# Altium PCB PROC091F.PcbDoc (part 3 of 8)
Units mil, origin at the board's own origin, x right, y up, seen from the top; angles counter-clockwise.
Board outline 3590.95 x 906.17 mil, 8 copper layers (Top Layer, GND1, Sig1, PWR1, PWR2, Sig2, GND2, Bottom Layer), stack 63.146 mil thick; 420 components, 316 nets, 1432 pads, 774 vias.
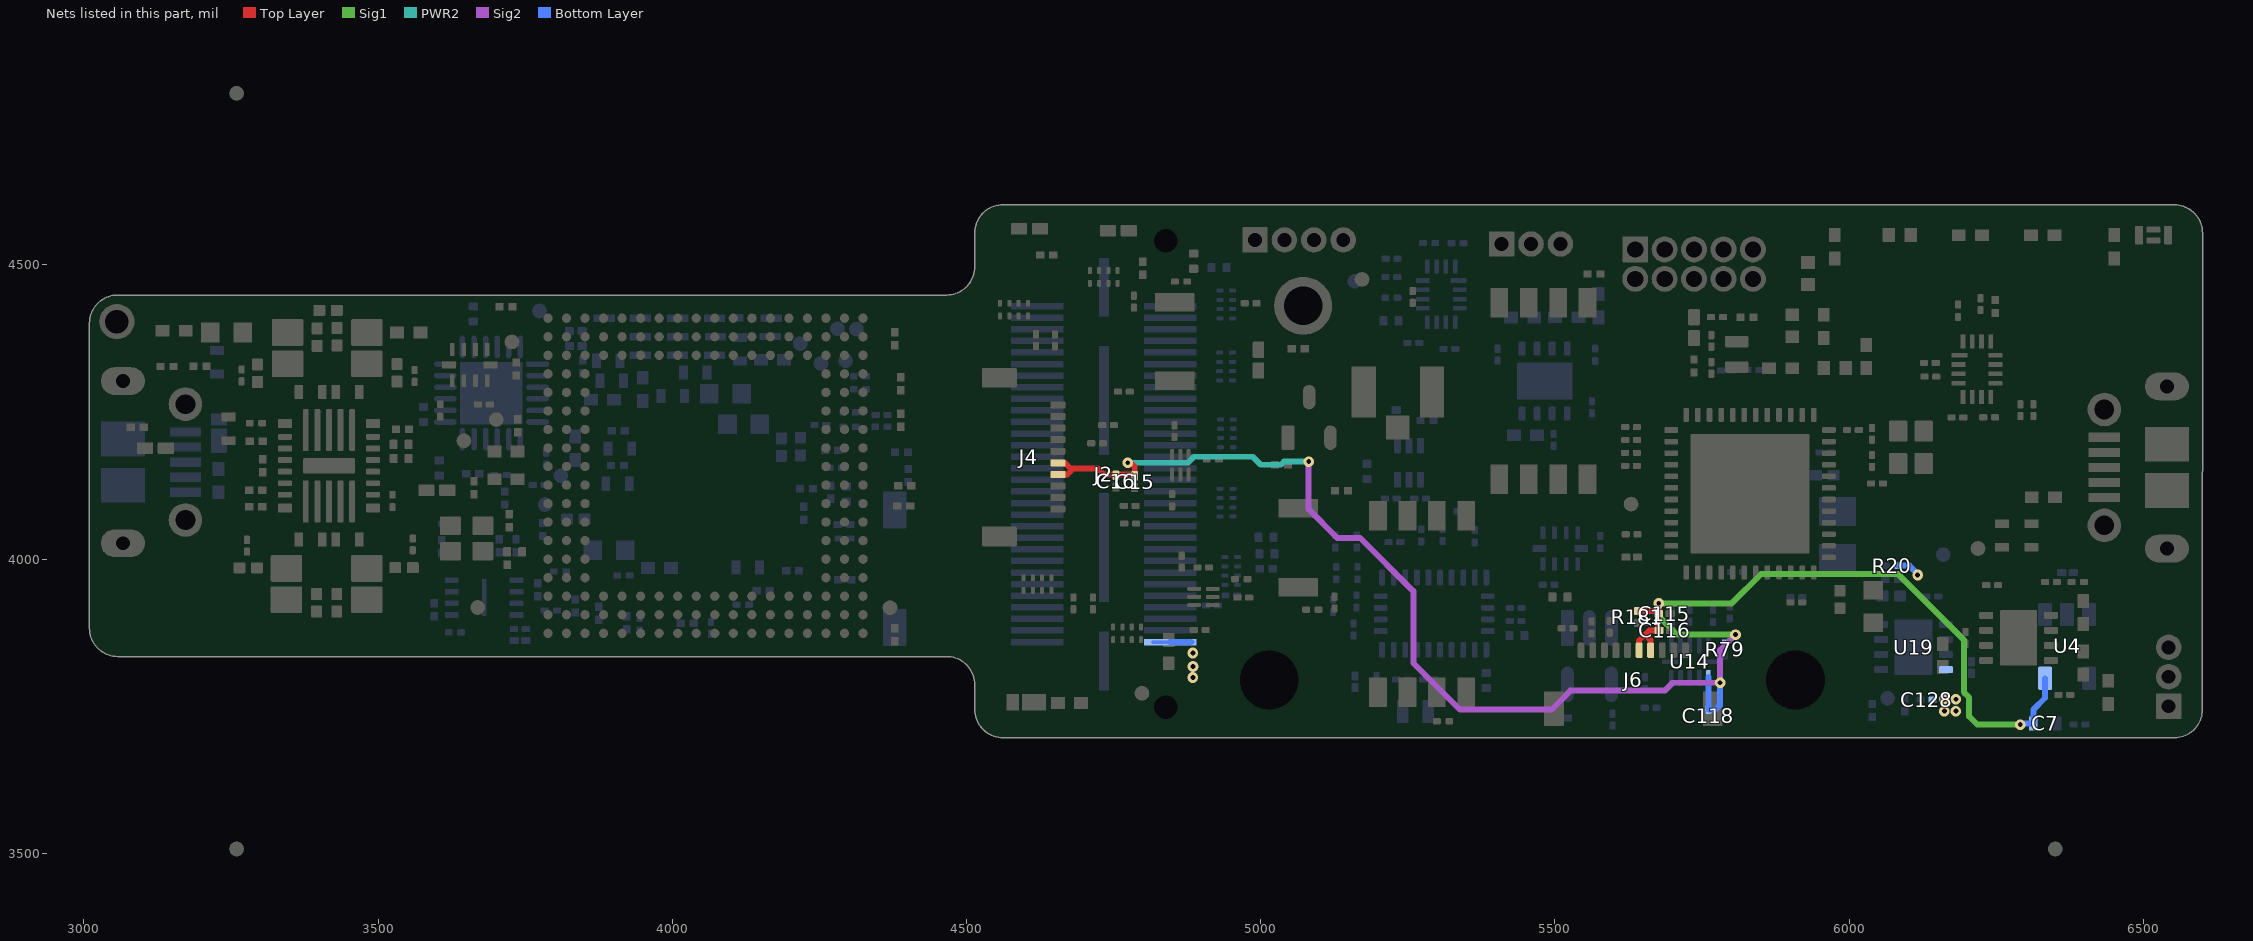
[diagram p8: the nets of this part, all layers, seen from the top]

## Part data (continued)
R4 R5 R9 R29 R37 R89 R92: library part CMP-0027261-3, "RES, 100 k, 1%, 0.05 W, 0201", Manufacturer=Vishay-Dale, Power_W=50mW, Supplier Part Number 1=541-100KAABCT-ND, TempCo="100 ppm/C", Tolerance_%=1%, Value2=0.05W, Value_Code=100k, AEC Category=Q200, AEC Grade=N/A, AEC Qualified=N, ComponentLink1Description="Datasheet link", ComponentLink1URL=http://www.vishay.com/docs/20052/crcw0201e3.pdf, CompType=Resistor, EIA_Code=E96, MountType=SMT, PackageReference=0201, PartNumber=CRCW0201100KFKED, Res_ohm=100k, RoHS=E, SizeArea_mm2=0.18, SizeX_mm=0.6, SizeY_mm=0.3, SizeZ_mm=0.26, Supplier 1=Digi-Key, Supplier 2=Newark, Supplier 3=Mouser, Supplier Part Number 2=84R1457, Supplier Part Number 3=71-CRCW0201100KFKED, Technology="Thick Film", Value1=1%, ValueDisplayed=100k, VDC_V=30V
R6 R46 R47 R48 R49: library part CMP-0027275-3, "RES, 33.2, 1%, 0.05 W, 0201", Manufacturer=Vishay-Dale, Power_W=50mW, Supplier Part Number 1=541-33.2ABCT-ND, TempCo="200 ppm/C", Tolerance_%=1%, Value2=0.05W, Value_Code=33R2, ValueDisplayed=33.2, AEC Category=Q200, AEC Grade=N/A, AEC Qualified=N, ComponentLink1Description="Datasheet link", ComponentLink1URL=http://www.vishay.com/docs/20052/crcw0201e3.pdf, CompType=Resistor, EIA_Code=E96, MountType=SMT, PackageReference=0201, PartNumber=CRCW020133R2FNED, Res_ohm=33.2, RoHS=E, SizeArea_mm2=0.18, SizeX_mm=0.6, SizeY_mm=0.3, SizeZ_mm=0.26, Supplier 1=Digi-Key, Supplier 2=Newark, Supplier 3=Mouser, Supplier Part Number 2=26W8649, Supplier Part Number 3=71-CRCW020133R2FNED, Technology="Thick Film", Value1=1%
R10 R11 R88 R130 R132 R133 R135 R137 R138 R140: library part CMP-0087185-1, "RES SMD 20 OHM 1% 1/20W 0201", Manufacturer=Yageo, Power_W=50mW, TempCo=200ppm/°C, Tolerance_%=1%, AEC Grade="Grade 0", AEC Qualified=Yes, ComponentLink1Description=Datasheet, ComponentLink1URL=http://www.yageo.com/NewPortal/yageodocoutput?fileName=/pdf/R-Chip/PYu-AC_51_RoHS_L_6.pdf, PackageReference=0201, PartNumber=AC0201FR-0720RL, Res_ohm=20, RoHS=TRUE, SizeZ_mm=0.26mm, Symbol Name=SYM-AC0201FR-0720RL, Technology="Thick Film", VDC_V=25V
R13 R15 R17 R42 R111: library part CMP-0027072-1, "RES, 220, 5%, 0.05 W, 0201", Manufacturer="Yageo America", Power_W=50mW, Supplier Part Number 1=311-220NCT-ND, TempCo="200 ppm/C", Tolerance_%=5%, Value2=0.05W, Value_Code=220R, ValueDisplayed=220, AEC Category=Q200, AEC Grade=N/A, AEC Qualified=N, ComponentLink1Description="Datasheet link", ComponentLink1URL=http://www.yageo.com/documents/recent/PYu-RC_Group_51_RoHS_L_5.pdf, CompType=Resistor, EIA_Code=E24, LatestRevisionDate=2017-03-09, MountType=SMT, PackageReference=0201, PartNumber=RC0201JR-07220RL, Published=2016-10-14, Publisher="Texas Instruments", Res_ohm=220, RoHS=Y, SizeArea_mm2=0.18, SizeX_mm=0.6, SizeY_mm=0.3, SizeZ_mm=0.26, Supplier 1=Digi-Key, Supplier 2=Mouser, Supplier Part Number 2=603-RC0201JR-07220RL, Technology="Thick Film", U/M=EA, Value1=5%, VDC_V=25V
R16 R174 R176: library part CMP-0027880-1, "RES, 7.87 k, 1%, 0.05 W, 0201", Manufacturer="Yageo America", Power_W=50mW, Supplier Part Number 1=YAG2807CT-ND, TempCo="200 ppm/C", Tolerance_%=1%, Value2=0.05W, Value_Code=7k87, ValueDisplayed=7.87k, AEC Category=Q200, AEC Grade=N/A, AEC Qualified=N, ComponentLink1Description="Datasheet link", ComponentLink1URL=http://www.yageo.com/documents/recent/PYu-RC_Group_51_RoHS_L_5.pdf, CompType=Resistor, EIA_Code=E96, LatestRevisionDate=2017-03-09, MountType=SMT, PackageReference=0201, PartNumber=RC0201FR-077K87L, Published=2016-10-14, Publisher="Texas Instruments", Res_ohm=7.87k, RoHS=Y, SizeArea_mm2=0.18, SizeX_mm=0.6, SizeY_mm=0.3, SizeZ_mm=0.26, Supplier 1=Digi-Key, Supplier 2=Mouser, Supplier Part Number 2=603-RC0201FR-077K87L, Technology="Thick Film", U/M=EA, Value1=1%, VDC_V=25V
R24: library part CMP-0087183-1, "RES SMD 200 OHM 1% 1/5W 0402", Manufacturer="Vishay Dale", Power_W=200mW, TempCo=100ppm/°C, Tolerance_%=1%, AEC Grade="Grade 0", AEC Qualified=Yes, ComponentLink1Description=Datasheet, ComponentLink1URL=http://www.vishay.com/docs/20043/crcwhpe3.pdf, PackageReference=0402, PartNumber=CRCW0402200RFKEDHP, Res_ohm=200, RoHS=TRUE, SizeZ_mm=0.4mm, Symbol Name=SYM-CRCW0402200RFKEDHP, Technology="Thick Film", VDC_V=50V
R25 R26 R33 R34 R38 R40 R64 R69 R141: library part CMP-0027745-1, "RES, 4.99 k, 1%, 0.05 W, 0201", Manufacturer="Yageo America", Power_W=50mW, Supplier Part Number 1=YAG2712CT-ND, TempCo="200 ppm/C", Tolerance_%=1%, Value2=0.05W, Value_Code=4k99, ValueDisplayed=4.99k, AEC Category=Q200, AEC Grade=N/A, AEC Qualified=N, ComponentLink1Description="Datasheet link", ComponentLink1URL=http://www.yageo.com/documents/recent/PYu-RC_Group_51_RoHS_L_5.pdf, CompType=Resistor, EIA_Code=E96, LatestRevisionDate=2017-03-09, MountType=SMT, PackageReference=0201, PartNumber=RC0201FR-074K99L, Published=2016-10-14, Publisher="Texas Instruments", Res_ohm=4.99k, RoHS=Y, SizeArea_mm2=0.18, SizeX_mm=0.6, SizeY_mm=0.3, SizeZ_mm=0.26, Supplier 1=Digi-Key, Supplier 2=Mouser, Supplier Part Number 2=603-RC0201FR-074K99L, Technology="Thick Film", U/M=EA, Value1=1%, VDC_V=25V
R27 R39 R107 R108: library part CMP-0027137-1, "RES, 510, 5%, 0.05 W, 0201", Manufacturer="Yageo America", Power_W=50mW, Supplier Part Number 1=YAG2907CT-ND, TempCo="200 ppm/C", Tolerance_%=5%, Value2=0.05W, Value_Code=510R, ValueDisplayed=510, AEC Category=Q200, AEC Grade=N/A, AEC Qualified=N, ComponentLink1Description="Datasheet link", ComponentLink1URL=http://www.yageo.com/documents/recent/PYu-RC_Group_51_RoHS_L_5.pdf, CompType=Resistor, EIA_Code=E24, LatestRevisionDate=2017-03-09, MountType=SMT, PackageReference=0201, PartNumber=RC0201JR-07510RL, Published=2016-10-14, Publisher="Texas Instruments", Res_ohm=510, RoHS=Y, SizeArea_mm2=0.18, SizeX_mm=0.6, SizeY_mm=0.3, SizeZ_mm=0.26, Supplier 1=Digi-Key, Supplier 2=Mouser, Supplier Part Number 2=603-RC0201JR-07510RL, Technology="Thick Film", U/M=EA, Value1=5%, VDC_V=25V
R50 R75: library part CMP-0027052-1, "RES, 1.0 k, 5%, 0.05 W, 0201", Manufacturer="Yageo America", Power_W=50mW, Supplier Part Number 1=311-1KNCT-ND, TempCo="200 ppm/C", Tolerance_%=5%, Value2=0.05W, Value_Code=1k00, ValueDisplayed=1.0k, AEC Category=Q200, AEC Grade=N/A, AEC Qualified=N, ComponentLink1Description="Datasheet link", ComponentLink1URL=http://www.yageo.com/documents/recent/PYu-RC_Group_51_RoHS_L_5.pdf, CompType=Resistor, EIA_Code=E24, LatestRevisionDate=2017-03-09, MountType=SMT, PackageReference=0201, PartNumber=RC0201JR-071KL, Published=2016-10-14, Publisher="Texas Instruments", Res_ohm=1k, RoHS=Y, SizeArea_mm2=0.18, SizeX_mm=0.6, SizeY_mm=0.3, SizeZ_mm=0.26, Supplier 1=Digi-Key, Supplier 2=Mouser, Supplier Part Number 2=603-RC0201JR-071KL, Technology="Thick Film", U/M=EA, Value1=5%, VDC_V=25V
R52: library part CMP-0027452-1, "RES, 1.96 k, 1%, 0.05 W, 0201", Manufacturer="Yageo America", Power_W=50mW, Supplier Part Number 1=YAG2494CT-ND, TempCo="200 ppm/C", Tolerance_%=1%, Value2=0.05W, Value_Code=1k96, ValueDisplayed=1.96k, AEC Category=Q200, AEC Grade=N/A, AEC Qualified=N, ComponentLink1Description="Datasheet link", ComponentLink1URL=http://www.yageo.com/documents/recent/PYu-RC_Group_51_RoHS_L_5.pdf, CompType=Resistor, EIA_Code=E96, LatestRevisionDate=2017-03-09, MountType=SMT, PackageReference=0201, PartNumber=RC0201FR-071K96L, Published=2016-10-14, Publisher="Texas Instruments", Res_ohm=1.96k, RoHS=Y, SizeArea_mm2=0.18, SizeX_mm=0.6, SizeY_mm=0.3, SizeZ_mm=0.26, Supplier 1=Digi-Key, Supplier 2=Mouser, Supplier Part Number 2=603-RC0201FR-071K96L, Technology="Thick Film", U/M=EA, Value1=1%, VDC_V=25V
R53 R54 R55 R56: library part CMP-0086444-2, "RES Thick Film SMD 3.83O 1% 1/16W 0402 200ppm/°C", Manufacturer=Yageo, Power_W=63mW, TempCo=200ppm/°C, Tolerance_%=1%, AEC Qualified=No, ComponentLink1Description=Datasheet, ComponentLink1URL=http://www.yageo.com/documents/recent/PYu-RC_Group_51_RoHS_L_10.pdf, PackageReference="0402 (1005 Metric)", PartNumber=RC0402FR-073R83L, Res_ohm=3.83, RoHS=TRUE, SizeZ_mm=0.4mm, Technology="Thick Film", VDC_V=50V
R79 R180 R181: library part CMP-0087184-1, "RESISTOR, 0201, 0.05W, 1%, 4K7", Manufacturer="Panasonic Electronic Components", Power_W=50mW, TempCo=200ppm/°C, Tolerance_%=1%, AEC Grade="Grade 1", AEC Qualified=Yes, ComponentLink1Description=Datasheet, ComponentLink1URL=https://industrial.panasonic.com/cdbs/www-data/pdf/RDA0000/AOA0000C304.pdf, PackageReference=0201, PartNumber=ERJ-1GNF4701C, Res_ohm=4.7k, RoHS=TRUE, SizeZ_mm=0.26mm, Symbol Name=SYM-ERJ-1GNF4701C, Technology="Thick Film", VDC_V=25V
R114 R117 R119 R126: library part CMP-0026491-2, "RES, 61.9, 1%, 0.063 W, AEC-Q200 Grade 0, 0402", Manufacturer=Vishay-Dale, Power_W=63mW, Supplier Part Number 1=541-61.9LCT-ND, TempCo="100 ppm/C", Tolerance_%=1%, Value2=0.063W, Value_Code=61R9, ValueDisplayed=61.9, AEC Category=Q200, AEC Grade=0, AEC Qualified=Y, ComponentLink1Description="Datasheet link", ComponentLink1URL=http://www.vishay.com/docs/20035/dcrcwe3.pdf, CompType=Resistor, EIA_Code=E96, MountType=SMT, PackageReference=0402, PartNumber=CRCW040261R9FKED, Res_ohm=61.9, RoHS=E, SizeArea_mm2=0.5, SizeX_mm=1, SizeY_mm=0.5, SizeZ_mm=0.6, Supplier 1=Digi-Key, Supplier 2=Newark, Supplier 3=Mouser, Supplier Part Number 2=52K7198, Supplier Part Number 3=71-CRCW0402-61.9-E3, Technology="Thick Film", Value1=1%, VDC_V=50V
R158 R170 R172: library part CMP-0027891-1, "RES, 82.5 k, 1%, 0.05 W, 0201", Manufacturer="Yageo America", Power_W=50mW, Supplier Part Number 1=YAG2815CT-ND, TempCo="200 ppm/C", Tolerance_%=1%, Value2=0.05W, Value_Code=82k5, ValueDisplayed=82.5k, AEC Category=Q200, AEC Grade=N/A, AEC Qualified=N, ComponentLink1Description="Datasheet link", ComponentLink1URL=http://www.yageo.com/documents/recent/PYu-RC_Group_51_RoHS_L_5.pdf, CompType=Resistor, EIA_Code=E96, LatestRevisionDate=2017-03-09, MountType=SMT, PackageReference=0201, PartNumber=RC0201FR-0782K5L, Published=2016-10-14, Publisher="Texas Instruments", Res_ohm=82.5k, RoHS=Y, SizeArea_mm2=0.18, SizeX_mm=0.6, SizeY_mm=0.3, SizeZ_mm=0.26, Supplier 1=Digi-Key, Supplier 2=Mouser, Supplier Part Number 2=603-RC0201FR-0782K5L, Technology="Thick Film", U/M=EA, Value1=1%, VDC_V=25V
R159 R171: library part CMP-0027165-1, "RES, 750, 5%, 0.05 W, 0201", Manufacturer="Yageo America", Power_W=50mW, Supplier Part Number 1=YAG2927CT-ND, TempCo="200 ppm/C", Tolerance_%=5%, Value2=0.05W, Value_Code=750R, ValueDisplayed=750, AEC Category=Q200, AEC Grade=N/A, AEC Qualified=N, ComponentLink1Description="Datasheet link", ComponentLink1URL=http://www.yageo.com/documents/recent/PYu-RC_Group_51_RoHS_L_5.pdf, CompType=Resistor, EIA_Code=E24, LatestRevisionDate=2017-03-09, MountType=SMT, PackageReference=0201, PartNumber=RC0201JR-07750RL, Published=2016-10-14, Publisher="Texas Instruments", Res_ohm=750, RoHS=Y, SizeArea_mm2=0.18, SizeX_mm=0.6, SizeY_mm=0.3, SizeZ_mm=0.26, Supplier 1=Digi-Key, Supplier 2=Mouser, Supplier Part Number 2=603-RC0201JR-07750RL, Technology="Thick Film", U/M=EA, Value1=5%, VDC_V=25V
RA1 RA2 RA3 RA4 RA5 RA6 RA7 RA8 RA9: library part CMP-0087186-1, "RES ARRAY 4 RES ZERO OHM 0502", Manufacturer="Panasonic Electronic Components", Power_W=100mW, TempCo=-200/+600ppm/°C, Tolerance_%=5%, AEC Qualified=No, ComponentLink1Description=Datasheet, ComponentLink1URL=https://industrial.panasonic.com/cdbs/www-data/pdf/AOC0000/AOC0000C14.pdf, PackageReference=0502, PartNumber=EXB-18VR000X, Res_ohm=0, RoHS=TRUE, SizeZ_mm=0.45mm, Symbol Name=SYM-EXB-18VR000X, Technology="Thick Film", VDC_V=12.5V
S1 S2: library part CMP-0002128-2, "Switch, Slide, SPST 4 poles, SMT", CurrentRating_mA=25A, Manufacturer="CTS Electrocomponents", Supplier Part Number 1=CT2184LPST-ND, Circuit=SPST, ComponentLink1Description="Datasheet URL", ComponentLink1URL=http://www.ctscorp.com/components/Datasheets/218.pdf, CompType=Switch, LatestRevisionDate=2017-03-09, MountType=SMT, Orientation=Horizontal, PackageReference="SW, SMT Half Pitch 4SPST, 5.8x2.7x6.25 mm", PartNumber=218-4LPST, PositionCount=4, Publisher="Texas Instruments", RoHS=Y, Supplier 1=Digi-Key, Supplier 2=Mouser, Supplier Part Number 2=774-2184LPST, SwitchFunction=Off-On, VDC_V=24V
S3: library part CMP-0087181-1, "SWITCH SLIDE DIP SPST 100MA 6V", Manufacturer="Nidec Copal Electronics", Circuit=SPST, ComponentLink1Description=Datasheet, ComponentLink1URL=https://www.nidec-copal-electronics.com/e/catalog/switch/chs.pdf, MountType="Surface Mount", PackageReference=SMT_SW_5MM4_2MM5, PartNumber=CHS-01TA, PositionCount=1, RoHS=TRUE, SizeZ_mm=2.5mm, Symbol Name=SYM-CHS-01TA, VDC_V=6V
SW2 SW3: library part CMP-0002150-2, "SWITCH TACTILE SPST-NO 0.05A 12V", CurrentRating_mA=50A, Manufacturer="Omron Electronic Components", Supplier Part Number 1=SW1020CT-ND, Circuit=SPST-NO, ComponentLink1Description="Datasheet URL", ComponentLink1URL=http://www.components.omron.com/components/web/PDFLIB.nsf/0/2DD3893C7DD33E9E862572900079E9D6/$file/B3U_1110.pdf, CompType=Switch, LatestRevisionDate=2017-03-09, MountType=SMT, Orientation="Top Actuated", PackageReference=3x1.6x2.5mm, PartNumber=B3U-1000P, PositionCount=1, Publisher="Texas Instruments", RoHS=Y, Supplier 1=Digi-Key, Supplier 2=Newark, Supplier 3=Mouser, Supplier Part Number 2=34M5295, Supplier Part Number 3=653-B3U-1000P, SwitchFunction=Off-Mom, VDC_V=12V
TP2 TP3 TP4 TP5 TP6 TP7 TP8 TP9 TP10 TP11 TP12 TP13 TP14 TP15 TP16 TP17 TP18 TP19 TP26 TP27 TP46: library part CMP-0078143-3, "TEST POINT.  No entry in BOM.", Manufacturer=N/A, CompType=Testpoint, PackageReference=N/A, PartNumber=N/A
TP20: library part CMP-0086474-1, "PC Test Point, Loop Brass, Tin Plating 0.047\" (1.19mm) Hole Diameter Mounting Type", Manufacturer="Keystone Electronics", ComponentLink1Description=Datasheet, ComponentLink1URL=https://www.keyelco.com/product-pdf.cfm?p=1307, ContactFinish=Tin, PackageReference=HDR1, PartNumber=4953, PinCount=1, RoHS=TRUE, Symbol Name=SYM-4953
U1: library part CMP-0079120-2, "4-A + 2.5-A + Two 1.5-A Buck Converters With Integrated Switches, RNF0026C (VQFN-HR-26)", Alternate Manufacturer="Texas Instruments", Alternate PartNumber=LP87524JRNFTQ1, AEC Category=Q200, AEC Qualified=Y, ComponentLink1Description="Datasheet Link", ComponentLink1URL=http://www.ti.com/lit/ds/symlink/lp87524-q1.pdf, ComponentLink2Description="Product Folder", ComponentLink2URL=http://www.ti.com/product/lp87524-q1, CompType=IC, Manufacturer="Texas Instruments", MountType=SMT, PackageDescription=VQFN-HR-26, PackageReference=RNF0026C, PartNumber=LP87524JRNFRQ1, RoHS=Y, SizeArea_mm2=18, SizeAreaWB_mm2=27.5, SizeX_mm=4, SizeY_mm=4.5, SizeZ_mm=0.9
U2: library part CMP-0860942-2, "XI6843ARQGALP, ALP0180A (BGA-180)", Alternate Manufacturer="Texas Instruments", AEC Category=Q200, AEC Qualified=N, ComponentLink1Description="Datasheet Link", ComponentLink1URL=http://www.ti.com/lit/ds/symlink/xi6843arqg.pdf, ComponentLink2Description="Product Folder", ComponentLink2URL=http://www.ti.com/product/xi6843arqg, ComponentLink3Description="Online Datasheet", ComponentLink3URL=http://www.ti.com/product/xi6843arqg/datasheet, CompType=IC, Manufacturer="Texas Instruments", MountType=SMT, PackageDescription=BGA-180, PackageReference=ALP0180A, PartNumber=XI6843ARQGALP, SizeArea_mm2=225, SizeAreaWB_mm2=289, SizeX_mm=15, SizeY_mm=15, SizeZ_mm=0.965
U3: library part CMP-0087172-1, "I/O Controller Interface IC USB to Dual UART bridge", Manufacturer="Silicon Labs", ComponentLink1Description=Datasheet, ComponentLink1URL=https://www.silabs.com/documents/public/data-sheets/CP2105.pdf, PackageReference=QFN24-EP, PartNumber=CP2105-F01-GMR, RoHS=TRUE, SizeZ_mm=0.8mm, Symbol Name=SYM-CP2105-F01-GMR
U4: library part CMP-0035419-1, "Single Output High PSRR LDO, 200 mA, Fixed 3 V Output, 2.7 to 5.5 V Input, 5-pin SOT-23 (DBV), -40 to 85 degC, Green (RoHS & no Sb/Br)", Manufacturer="Texas Instruments", Rating=Catalog, Accuracy(%)=2, Code_JEDEC=MO-178, ComponentLink1Description="Manufacturer URL", ComponentLink1URL=http://www.ti.com/, ComponentLink2Description=Datasheet, ComponentLink2URL=http://www.ti.com/general/docs/lit/getliterature.tsp?genericPartNumber=TPS79330&fileType=pdf, ComponentLink3Description="Package Specification", ComponentLink3URL=http://www.ti.com/litv/pdf/mpds018i, DatasheetVersion=SLVS348K, Eco-Plan="Green (RoHS & no Sb/Br)", Fixed Output Options(V)=3, Iout(Max)(A)=0.2, Iq(Typ)(mA)=0.2, Mounting Technology="Surface Mount", PackageDescription="5-Pin Plastic Small Outline, Body 1.60 Ã— 2.90 mm, Pitch 0.95 mm", PackageReference=DBV0005A, PackageVersion=4073253-4/K, PartNumber=TPS79330DBVR, SubFamily="Single Channel LDO", Vdo(Typ)(mV)=112, Vin(Max)(V)=5.5, Vin(Min)(V)=2.7, Vout Adj(Max)(V)=3, Vout Adj(Min)(V)=3
U5: library part CMP-0067398-2, "Automotive Grade, 1.4V-Capable +/-0.5degC Temperature Sensor with Alert Function and I2C/SMBus, DRL0006A (SOT-OTHER-6)", Alternate Manufacturer="Texas Instruments", ComponentLink1Description="Datasheet Link", ComponentLink1URL=http://www.ti.com/lit/ds/symlink/tmp112-q1.pdf, CompType=IC, LatestRevisionDate=2017-06-09, Manufacturer="Texas Instruments", MountType=SMT, PackageDescription=SOT-OTHER-6, PackageReference=DRL0006A, PartNumber=TMP112AQDRLRQ1, Publisher="Texas Instruments", RoHS=Y, SizeArea_mm2=2.56, SizeAreaWB_mm2=6.76, SizeX_mm=1.6, SizeY_mm=1.6, SizeZ_mm=0.6, U/M=EA
U6: library part CMP-0087170-1, "8KB I2C SER EEPROM TSOT 23", Manufacturer="ON Semiconductor", ComponentLink1Description=Datasheet, ComponentLink1URL=https://www.onsemi.com/pub/Collateral/CAT24C01-D.PDF, PackageReference=TSOT-23-5, PartNumber=CAT24C08TDI-GT3, RoHS=TRUE, SizeZ_mm=1mm, Symbol Name=SYM-CAT24C08TDI-GT3
U7: library part CMP-0087171-1, "IMU ACCEL/GYRO/MAG I2C 32BIT", Manufacturer="Hillcrest Laboratories, Inc.", ComponentLink1Description=Datasheet, ComponentLink1URL=https://www.hillcrestlabs.com/download/5a747b8d566d073a5d000536, PackageReference=LGA28, PartNumber=BNO085, RoHS=TRUE, SizeZ_mm=1.18mm, Symbol Name=SYM-BNO085
U8: library part CMP-0083675-2, "SimpleLink(TM) Bluetooth(R) 5 low energy Wireless MCU, RGZ0048A (VQFN-48)", Alternate Manufacturer="Texas Instruments", Alternate PartNumber=CC2642R1FRGZT, Operating Temperature Range="-40 to 85 C", Rating=#N/A, AEC Category=Q200, AEC Qualified=N, ComponentLink1Description="Datasheet Link", ComponentLink1URL=http://www.ti.com/lit/ds/symlink/cc2642r.pdf, ComponentLink2Description="Product Folder", ComponentLink2URL=http://www.ti.com/product/cc2642r, ComponentLink3Description="Online Datasheet", ComponentLink3URL=http://www.ti.com/product/cc2642r/datasheet, CompType=IC, Manufacturer="Texas Instruments", MountType=SMT, PackageDescription=VQFN-48, PackageReference=RGZ0048A, PartNumber=CC2642R1FRGZR, SizeArea_mm2=49, SizeAreaWB_mm2=81, SizeX_mm=7, SizeY_mm=7, SizeZ_mm=1
U9: library part CMP-0078466-1, "ULTRA LOW POWER, 16M-BIT [x 1/x 2/x 4] CMOS MXSMIO (SERIAL MULTI I/O) FLASH MEMORY, SON-8", Manufacturer="Macronix International Co., LTD", Supplier Part Number 1=1092-1178-1-ND, ComponentLink1Description="Datasheet URL", ComponentLink1URL=http://www.macronix.com/Lists/Datasheet/Attachments/6257/MX25R1635F,%20Wide%20Range,%2016Mb,%20v1.5.pdf, MountType=SMT, PackageReference=SON-8, PartNumber=MX25R1635FZUIH0, RoHS=Y, SizeArea_mm2=6, SizeAreaWB_mm2=12, SizeX_mm=3, SizeY_mm=2, SizeZ_mm=0.6, Supplier 1=Digi-Key
U10: library part CMP-0043349-1, "Low-Voltage 8-Bit I2C and SMBus I/O Expander, 1.65 to 5.5 V, -40 to 85 degC, 16-pin UQFN (RSV), Green (RoHS & no Sb/Br)", 5V Tolerant I/O=Yes, Manufacturer="Texas Instruments", Max Frequency(kHz)=400, # of I/Os=8, Code_JEDEC=MO-288*, ComponentLink1Description=Datasheet, ComponentLink1URL=http://www.ti.com/general/docs/lit/getliterature.tsp?genericPartNumber=TCA6408A&fileType=pdf, ComponentLink2Description="Package Specification", ComponentLink2URL=http://www.ti.com/litv/pdf/mpqf115g, Configuration Registers=Yes, DatasheetVersion=SCPS192C, Eco-Plan="Green (RoHS & no Sb/Br)", fSCLK(Max)(MHz)=400, I2C Address="0100 00x", Interrupt Output=Yes, Low Power=Yes, Mounting Technology="Surface Mount", No. of Outputs=8, PackageDescription="16-Leads Plastic Quad Flatpack No-Lead, 2.6 x 1.8 x 0.5 mm Body, 0.4 mm Pitch", PackageReference=RSV0016A, PackageVersion="revD, Dec-2011", PartNumber=TCA6408ARSVR, Push-Pull I/O Type=Yes, Reset Input=Yes, SubFamily="I2C IO Expander", VCC(Max)(V)=5.5, VCC(Min)(V)=1.65, Vcc range(V)="1.65 to 5.5"
U11: library part CMP-0050992-5, "1-Channel, 2:1 Analog Switch, DSF0006A (X2SON-6)", F @ Nom Voltage(Max)(Mhz)=150, Generic Part Number=SN74LVC1G3157, ICC @ Nom Voltage(Max)(mA)=0.01, Manufacturer="Texas Instruments", Operating Temperature Range="-40 to 85 C", Rating=Catalog, tpd @ Nom Voltage(Max)(ns)=2,1.2,0.8,0.3, Voltage(Nom)(V)=1.8,2.5,3.3,5, 3-State Output=No, AEC Category=Q200, AEC Qualified=N, Bits(#)=1, Channels(#)=1, ComponentLink1Description="Datasheet Link", ComponentLink1URL=http://www.ti.com/lit/ds/symlink/sn74lvc1g3157.pdf, ComponentLink2Description="Product Folder", ComponentLink2URL=http://www.ti.com/product/sn74lvc1g3157, ComponentLink3Description="Online Datasheet", ComponentLink3URL=http://www.ti.com/product/sn74lvc1g3157/datasheet, CompType=IC, Input Type=CMOS/TTL, Logic=True, MountType=SMT, Mux Configuration=1:2, Output Drive (IOL/IOH)(Max)(mA)=32/-32, Output Type=CMOS, PackageDescription=X2SON-6, PackageReference=DSF0006A, PartNumber=SN74LVC1G3157DSFR, RoHS=Y, Schmitt Trigger=No, Switch Configuration=SPDT, Technology Family=LVC, VCC(Max)(V)=5.5, VCC(Min)(V)=1.65
U12 U17: library part CMP-0065183-3, "Automotive Fault Protected CAN Transceiver With Flexible Data-Rate, DRB0008F (VSON-8)", Alternate Manufacturer="Texas Instruments", Alternate PartNumber=TCAN1042HGVDRBTQ1, Operating Temperature Range="-55 to 125 C", Rating=Automotive, AEC Category=Q200, AEC Qualified=Y, ComponentLink1Description="Datasheet Link", ComponentLink1URL=http://www.ti.com/lit/ds/symlink/tcan1042hgv-q1.pdf, ComponentLink2Description="Product Folder", ComponentLink2URL=http://www.ti.com/product/tcan1042hgv-q1, ComponentLink3Description="Online Datasheet", ComponentLink3URL=http://www.ti.com/product/tcan1042hgv-q1/datasheet, CompType=IC, Manufacturer="Texas Instruments", MountType=SMT, PackageDescription=VSON-8, PackageReference=DRB0008F, PartNumber=TCAN1042HGVDRBRQ1, RoHS=Y, SizeArea_mm2=9.0, SizeAreaWB_mm2=16.0, SizeX_mm=3.0, SizeY_mm=3.0, SizeZ_mm=1.0
U13: library part CMP-0067415-1, "10-Ohm Quad SPDT Analog Switch, RSV0016A (UQFN-16)", Alternate Manufacturer="Texas Instruments", ComponentLink1Description="Datasheet Link", ComponentLink1URL=http://www.ti.com/lit/ds/symlink/ts3a5018.pdf, CompType=IC, Footprint Path 6=C:\AltiumLibraries\Footprints\TI\.PcbLib, LatestRevisionDate=2017-06-09, Manufacturer="Texas Instruments", MountType=SMT, PackageDescription=UQFN-16, PackageReference=RSV0016A, PartNumber=TS3A5018RSVR, Publisher="Texas Instruments", RoHS=Y, SizeArea_mm2=4.68, SizeAreaWB_mm2=10.08, SizeX_mm=1.8, SizeY_mm=2.6, SizeZ_mm=0.55, U/M=EA
U14: library part CMP-0860038-1, "Automotive 4-Bit Bidirectional Voltage-Level Translator with Auto Direction Sensing and +/-15kV ESD, RUT0012A (UQFN-12)", Alternate Manufacturer="Texas Instruments", Operating Temperature Range="-40 to 125 C", Rating=Automotive, AEC Category=Q200, AEC Qualified=Y, ComponentLink1Description="Datasheet Link", ComponentLink1URL=http://www.ti.com/lit/ds/symlink/txb0104-q1.pdf, ComponentLink2Description="Product Folder", ComponentLink2URL=http://www.ti.com/product/txb0104-q1, ComponentLink3Description="Online Datasheet", ComponentLink3URL=http://www.ti.com/product/txb0104-q1/datasheet, CompType=IC, Manufacturer="Texas Instruments", MountType=SMT, PackageDescription=UQFN-12, PackageReference=RUT0012A, PartNumber=TXB0104QRUTRQ1, RoHS=Y, SizeArea_mm2=3.4, SizeAreaWB_mm2=8.1, SizeX_mm=1.7, SizeY_mm=2, SizeZ_mm=0.55
U15 U18: library part CMP-0074545-1, "Dual 10-ohm SPDT Analog Switch, RSE0010A (UQFN-10)", Alternate Manufacturer="Texas Instruments", ComponentLink1Description="Datasheet Link", ComponentLink1URL=http://www.ti.com/lit/ds/symlink/ts5a23157.pdf, CompType=IC, Footprint Path 6=C:\AltiumLibraries\Footprints\TI\.PcbLib, LatestRevisionDate=2017-06-09, Manufacturer="Texas Instruments", MountType=SMT, PackageDescription=UQFN-10, PackageReference=RSE0010A, PartNumber=TS5A23157RSER, Publisher="Texas Instruments", RoHS=Y, SizeArea_mm2=3.0, SizeAreaWB_mm2=7.5, SizeX_mm=1.5, SizeY_mm=2.0, SizeZ_mm=0.6, U/M=EA
U16: library part CMP-0087998-2, "AND Gate IC 1 Channel  6-SON (1x1)", Digikey Part Number=296-30121-1-ND, Manufacturer="Texas Instruments", Max Supply Voltage=5.5V, Min Supply Voltage=1.65V, Mouser Part Number=595-SN74LVC1G11DSFR, Operating Temperature Range="-40°C to +125°C", AEC Category=Q200, AEC Qualified=No, ComponentLink1Description=Datasheet, ComponentLink1URL=http://www.ti.com/lit/ds/symlink/sn74lvc1g11.pdf, ComponentLink2Description="Product Folder", ComponentLink2URL=http://www.ti.com/product/GPN, ComponentLink3Description="Online Datasheet", ComponentLink3URL=http://www.ti.com/product/GPN/datasheet, CompType=IC, Datasheet=http://www.ti.com/lit/ds/symlink/sn74lvc1g11.pdf, Datasheet Path=datasheets/IC_SN74LVC1G11DSFR.pdf, Digikey Description="IC GATE AND 1CH 3-INP 6SON", helpURL=https://upverter.com/upn/revision/721ddc34b28c671c/, Lead Free=Yes, Logic Function Desc=AND, Mouser Description="Logic Gates Sgl 3-Inp Pos-AND Gate", Number of Inputs=3, Number Of Outputs=1, PackageReference=X2SON-6, Part Number=SN74LVC1G11DSFR, PartNumber=SN74LVC1G11DSFR, PositionCount=1, RoHS=TRUE, SizeZ_mm=0.4mm, Standoff Height=0mm, TaMax_C=+125°C, TaMin_C=-40°C, TJmax_C=+150°C
U19: library part CMP-0043358-3, "Dual In / Single Out Autoswitching Power Mux, 2.8 to 5.5 V, -40 to 85 degC, 8-pin SON (DRB), Green (RoHS & no Sb/Br)", IN1, IN2 Input Voltage(Max)(V)=5.5, IN1, IN2 Input Voltage(Min)(V)=2.8, IN1 Output Current(Max)(A)=1.25, Manufacturer="Texas Instruments", AEC Category=Q200, AEC Qualified=N, ComponentLink1Description=Datasheet, ComponentLink1URL=http://www.ti.com/general/docs/lit/getliterature.tsp?genericPartNumber=TPS2115A&fileType=pdf, CompType=IC, DatasheetVersion=SBVS044F, Eco-Plan="Green (RoHS & no Sb/Br)", IN1 rDS(on)(Typ)(mOhm)=84, IN2 Output Current(Max)(A)=1.25, IN2 rDS(on)(Typ)(Ohms)=0.084, MountType=SMT, Number of Inputs=2, PackageDescription=VSON-8, PackageReference=DRB0008B, PackageVersion="revK, Jun-2012", PartNumber=TPS2115ADRBR, RoHS=Y, SizeArea_mm2=9.0, SizeAreaWB_mm2=16.0, SizeX_mm=3.0, SizeY_mm=3.0, SizeZ_mm=1.0, SubFamily="Power Multiplexer (MUX)"
Y1: library part CMP-0087164-1, "CRYSTAL 40.0000MHZ 8PF SMD", Frequency_Fixed=40MHz, Frequency Stability=15ppm, Load Capacitance=8pF, Manufacturer="Kyocera International Inc. Electronic Components", AEC Qualified=No, ComponentLink1Description=Datasheet, ComponentLink1URL=https://global.kyocera.com/prdct/electro/product/pdf/cx2016db_e.pdf, Frequency Tolerance=15ppm, PackageReference=SMT_2MM0_1MM6, PartNumber=CX2016DB40000D0FLJCC, RoHS=TRUE, SizeZ_mm=0.45mm, Symbol Name=SYM-CX2016DB40000D0FLJCC
Y2: library part CMP-0088076-1, "48MHz ±20ppm Crystal 7pF 50 Ohms 4-SMD, No Lead", Frequency_Fixed=48MHz, Frequency Tolerance=20ppm, Load Capacitance=7pF, Manufacturer=Kyocera, AEC Qualified=No, ComponentLink1Description=Datasheet, ComponentLink1URL=https://global.kyocera.com/prdct/electro/product/pdf/cx2016db_e.pdf, PackageReference=SMD4, PartNumber=CX2016DB48000C0WPLA2, RoHS=TRUE, SizeZ_mm=0.45mm, Symbol Name=SYM-CX2016DB48000C0WPLA2
Y3 Y4: library part CMP-0088006-1, "CRYSTAL 32.768KHZ 4PF SMD", Frequency_Fixed=32.768kHz, Frequency Tolerance=20ppm, Load Capacitance=4pF, Manufacturer="Abracon LLC", AEC Qualified=No, ComponentLink1Description=Datasheet, ComponentLink1URL=https://abracon.com/Resonators/ABS05W.pdf, PackageReference=XTAL_SMT_1MM6_1MM0, PartNumber=ABS05W-32.768KHZ-D-2-T, RoHS=TRUE, SizeZ_mm=0.5mm, Symbol Name=SYM-ABS05W-32.768KHZ-D-2-T
ZZ1: library part CMP-0003616-3, ClassName=AssemblyNote, CompType=AssemblyNote, Key=AssemblyNoteLabel, LatestRevisionDate=2017-03-09, Publisher="Texas Instruments"
ZZ2: library part CMP-0077236-1, ClassName=AssemblyNote, CompType=AssemblyNote, Key=AssemblyNote, LatestRevisionDate=2017-08-10, Publisher="Texas Instruments"
ZZ3: library part CMP-0077237-1, ClassName=AssemblyNote, CompType=AssemblyNote, Key=AssemblyNote, LatestRevisionDate=2017-08-10, Publisher="Texas Instruments"
ZZ4 ZZ5.2: library part CMP-0077238-1, ClassName=AssemblyNote, CompType=AssemblyNote, Key=AssemblyNote, LatestRevisionDate=2017-08-10, Publisher="Texas Instruments"
ZZ5.1: library part CMP-0077238-1, "Cut the thermal pad(Part Number#GPVOUS-0.125-AC-0816) for the shape and size of the inner surface of the heatsink(Part Number#160018120021) and paste it on the inner surface of the heatsink;", ClassName=AssemblyNote, CompType=AssemblyNote, Key=AssemblyNote, LatestRevisionDate=2017-08-10, Publisher="Texas Instruments"

## Via types
v1: diameter 18, hole 8, Top Layer to Bottom Layer, tented both sides, 737 vias
v2: diameter 19.68, hole 7.87, Top Layer to Bottom Layer, tented both sides, 36 vias
v3: diameter 17, hole 8, Top Layer to Bottom Layer, tented both sides, 1 vias

## Nets (pads, with @x,y where several pads share a name; then routed paths per layer and width w, separated by ;. In a path a pad name is that pad's centre, name@x,y a point inside that pad or via, vN(x,y) a via of type N, cw(c..) or ccw(c..) an arc to the next point about the centre after c; other vN are vias at no path point)
3V0: C7.1 C15.1 C16.1 C115.1 C116.1 C118.1 J4.6 J4.7 J6.6 J6.7 R79.2 R181.2 U4.5 U14.1 | length 3021.3
  Top Layer w10: J4.7@4653.44,4143.81 4671.13,4143.81 4681.23,4153.91 ; J4.6@4653.44,4163.49 J4.6@4655.33,4163.49 4667.18,4163.49 4676.77,4153.91 4681.23,4153.91 ; v1(4774.17,4163.77) 4779.19,4163.77 4785.89,4157.08 4785.89,4142.64 4785.08,4143.44 4733.74,4143.44 4723.27,4153.91 4681.23,4153.91 ; R181.2@5639.79,3911.66 C115.1@5670.49,3911.66 ; J6.6@5643.01,3845.06 5643.01,3861.54 5653.24,3871.77 ; J6.7@5662.69,3842.06 5662.69,3862.32 5653.24,3871.77 ; C115.1@5676.11,3907.2 C115.1@5674.96,3907.2 ; v1(5676.18,3924.73) 5676.18,3908.42 C115.1@5674.96,3907.2 ; 5653.24,3871.77 5660.21,3878.74 5675.67,3878.74 5674.96,3879.45 C115.1@5674.96,3907.2
  Sig1 w10: v1(5806.88,3871.77) 5707.39,3871.77 5676.18,3902.98 v1(5676.18,3924.73) 5800.43,3924.73 5850.17,3974.46 6083.34,3974.46 6195,3862.8 6195,3773.9 6203.8,3765.1 6203.8,3732.72 6217.72,3718.79 v1(6290.97,3718.79)
  PWR2 w10: v1(4774.17,4163.77) 4876.32,4163.77 4886.45,4173.91 4986.43,4173.91 4999.95,4160.4 5034.48,4160.4 5039.83,4165.74 v1(5081.47,4165.74)
  Sig2 w10: v1(5081.47,4165.74) 5081.47,4084.56 5130.11,4035.92 5168.92,4035.92 5259.37,3945.46 5259.37,3823.46 5338.37,3744.46 5494.41,3744.46 5526.41,3776.46 5686.78,3776.46 5700.1,3789.79 v1(5780.63,3789.79) 5780.63,3845.63 v1@5806.82,3871.82
  Bottom Layer w10: U14.1@5760.73,3799.77 5760.73,3764.35 5760.69,3764.32 C118.1@5760.69,3743.88 5772.53,3743.88 5780.63,3751.98 v1(5780.63,3789.79) ; R79.2@5788.67,3856.48 5791.58,3856.48 v1(5806.88,3871.77) ; v1(6290.97,3718.79) 6292.97,3720.79 C7.1@6312.97,3720.79 6312.97,3743.97 6332.97,3763.97 U4.5@6332.97,3797.49
5V_HD_IN: C128.1 J2.2 R20.1 U19.8 | length 106.4
  Bottom Layer w6: J2.2@4816.76,3859.07 J2.2@4846.16,3859.07
  Bottom Layer w10: J2.2@4846.16,3859.07 J2.2@4882.13,3859.07 ; R20.1@6082.89,3988.94 6102.24,3988.94 6116.23,3974.95 v1(6116.23,3973.04)
  other v1: 6161.94,3741.7 6181.41,3741.74 6161.94,3761.63 6181.41,3761.68 4884.84,3798.74 4885,3817.45 4884.84,3840.39